# Altium PCB UARTRecorder.PcbDoc
Units mm, origin at the board's own origin, x right, y up, seen from the top; angles counter-clockwise.
Board outline 152.4 x 101.6 mm, 2 copper layers (Top Layer, Bottom Layer); 66 components, 53 nets, 258 pads, 164 vias.
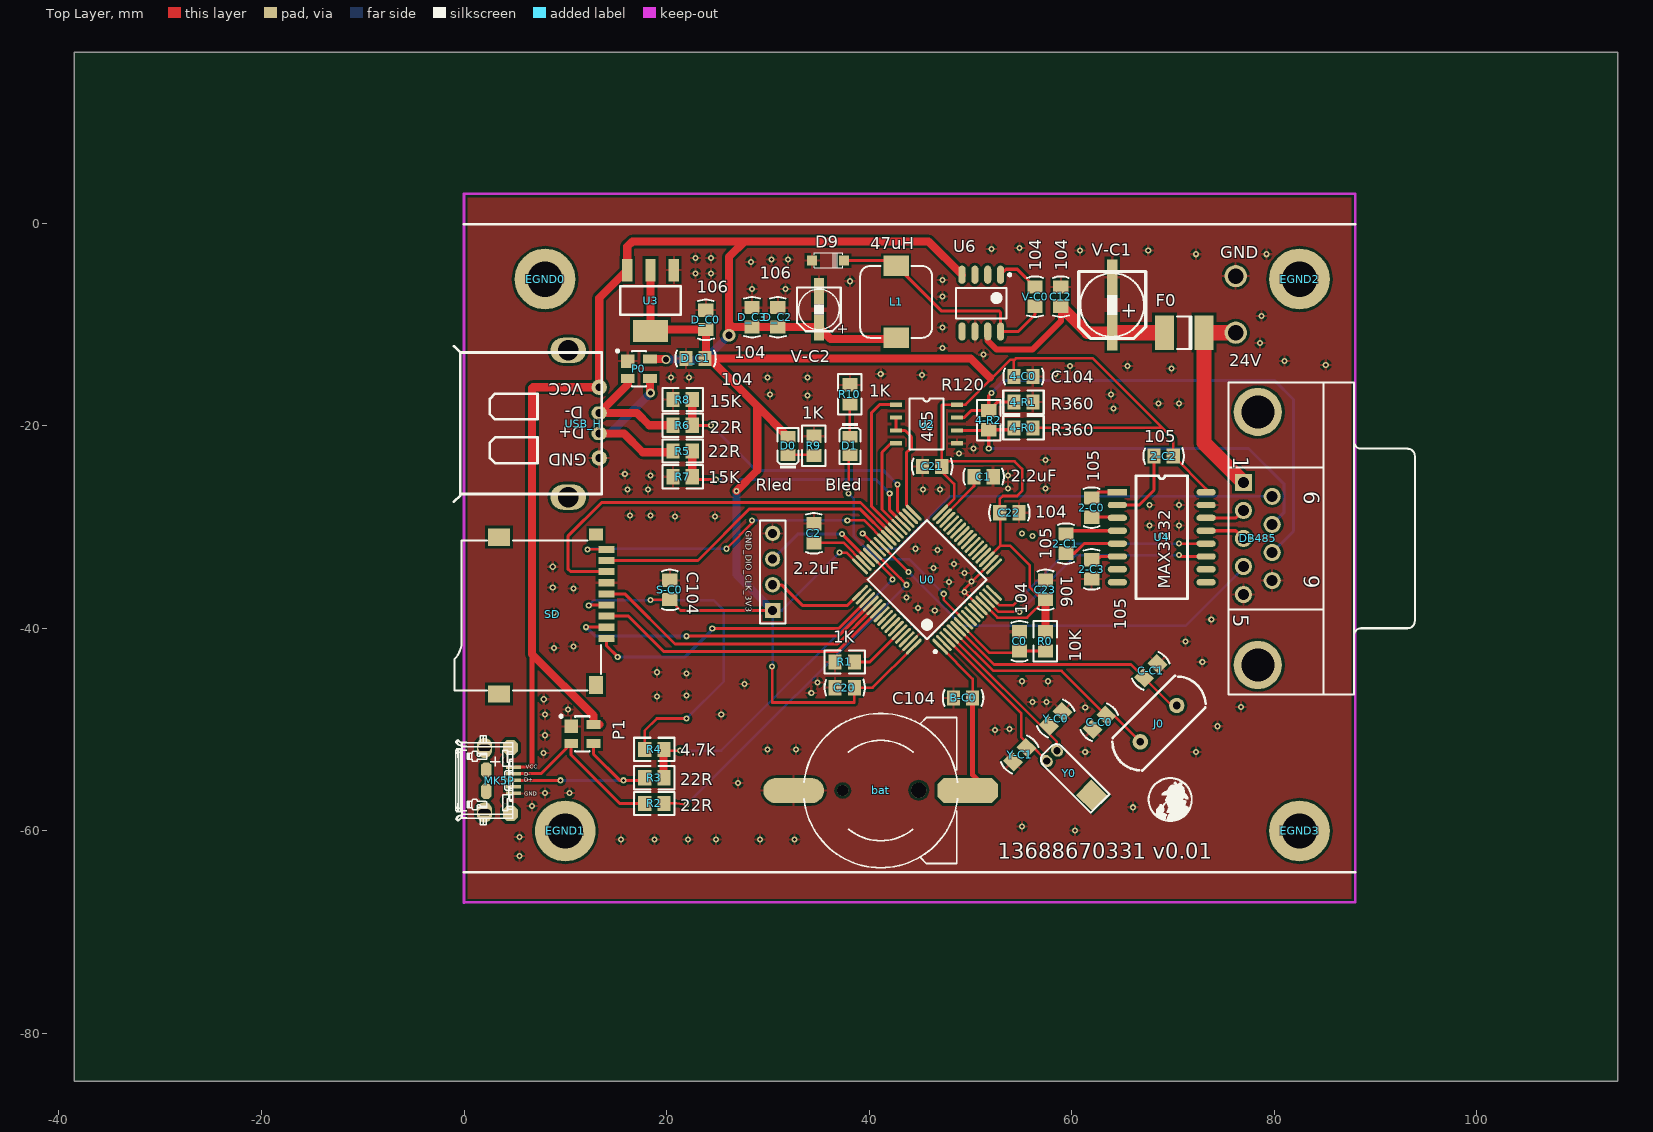
[diagram p0: Top Layer view]
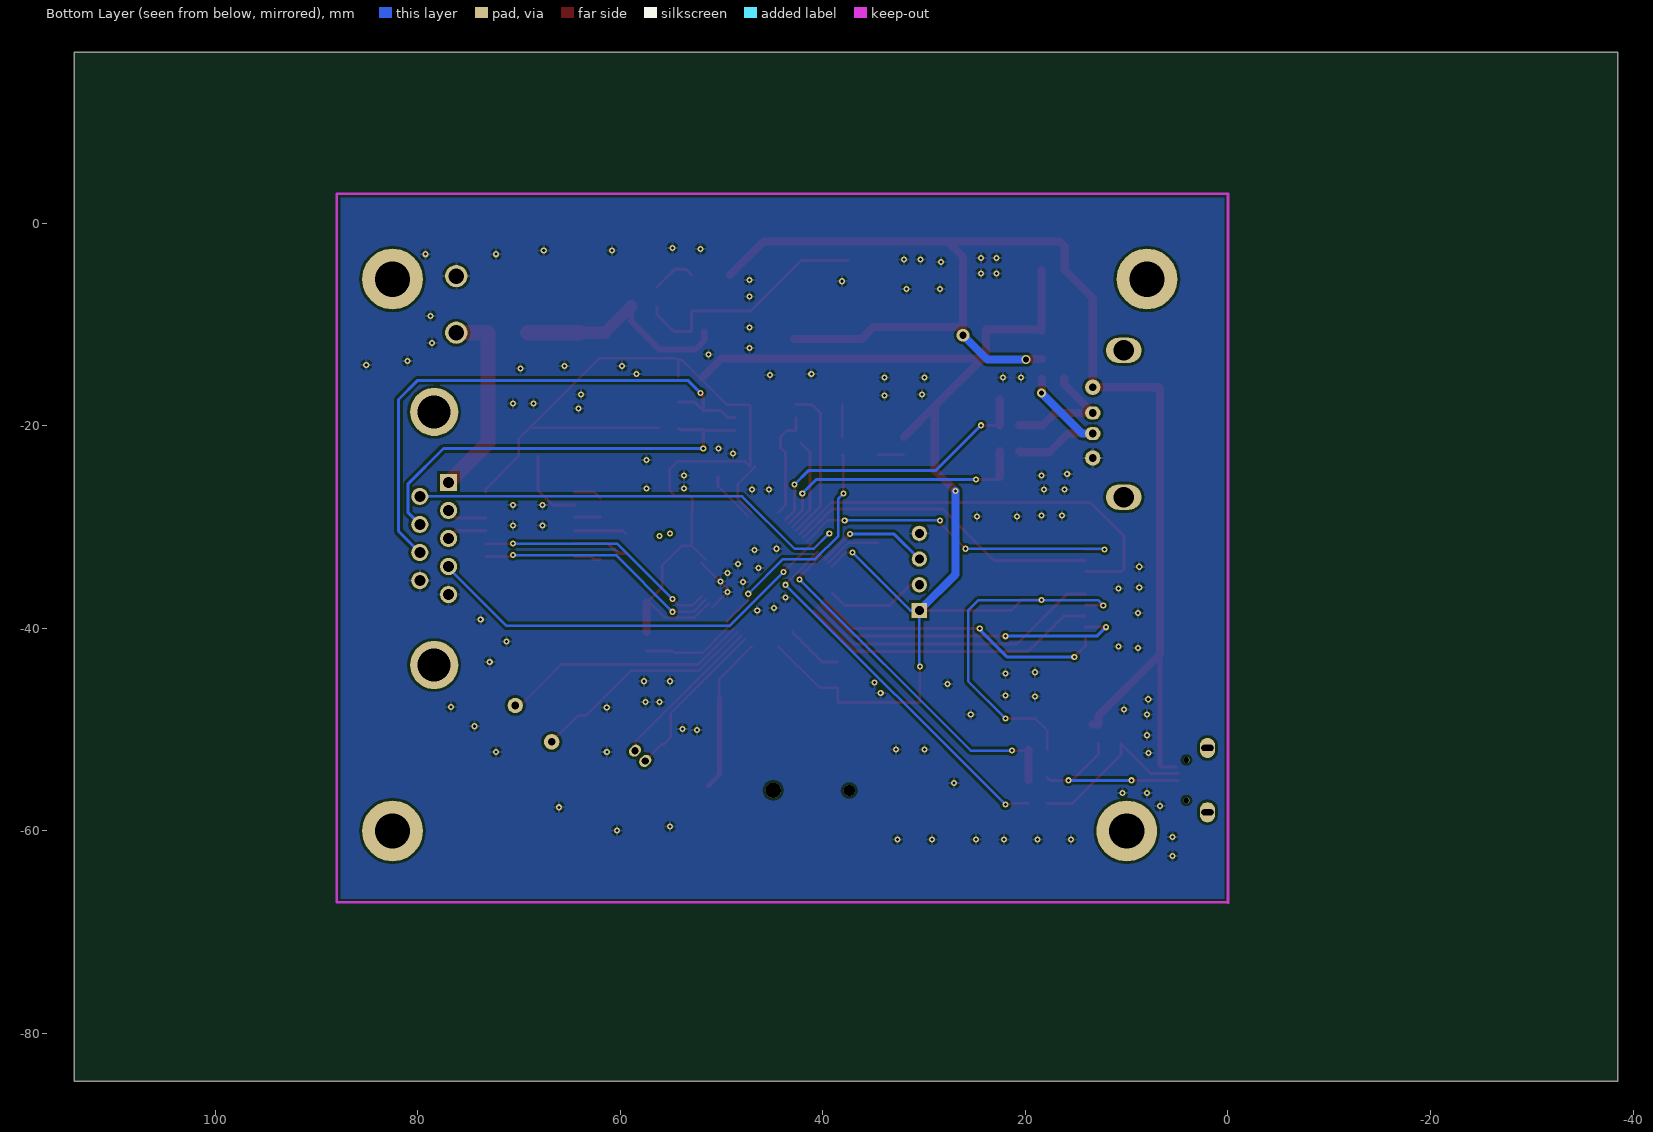
[diagram p1: Bottom Layer view, seen from below]

## Layer stack, top to bottom
Top Layer: signal copper 0.0356
Dielectric: dielectric 0.32, FR-4, Dk 4.8
Bottom Layer: signal copper 0.0356

## Board outline
-38.481,-84.709 113.919,-84.709 113.919,16.891 -38.481,16.891

## Design rules (kind name [scope] priority, off if disabled: settings)
Clearance [All] p1: gap=0.254
ComponentClearance [All] p1 off: gap=0.254 collisioncheckmode=3 verticalgap=0.254 showdistances=FALSE
Height [All] p1: minheight=0 maxheight=50.4 prefheight=12.7
HoleSize [All] p1: absolutevalues=TRUE maxlimit=6.3 minlimit=0.3 maxpercent=80.000 minpercent=20.000
HoleToHoleClearance [All] p1: gap=0.452 allowstackedmicrovias=TRUE
MinimumSolderMaskSliver [All] p1: minsoldermaskwidth=0.152
PasteMaskExpansion [All] p1: expansion=0.15
PolygonConnect [All] p1: connectstyle=Relief reliefconductorwidth=0.254 reliefentries=4 polygonreliefangle="90 Angle"
RoutingVias [All] p1: holewidth=0.4 width=0.8 viastyle="Through Hole" minholewidth=0.3 minwidth=0.6 maxholewidth=6.3 maxwidth=12
SilkscreenOverComponentPads [All] p1: minsilkscreentomaskgap=0
SolderMaskExpansion [All] p1: expansion=0.1
TestPointUsage [All] p1: valid=0 allowmultiple=FALSE
Testpoint [All] p1: side=15 testpointundercomponent=TRUE minsize=1.016 maxsize=2.54 preferedsize=1.524 minholesize=0 maxholesize=1.016 preferedholesize=0.813 testpointgrid=0.025 style=1021 order=0-112345678
Width VCC [InNet('VCC_5V')] p1: maxlimit=4 minlimit=0.254 preferedwidth=1
Width [All] p2: maxlimit=20 minlimit=0.2 preferedwidth=0.254
17 further rules are at their usual default settings.

## Components (designator, comment, footprint, x,y, rotation, side; value= is the part's Value field where it differs from the comment)
2-C0 "105" C-RAD-0805 61.976,-28.067 r90 top
2-C1 "105" C-RAD-0805 59.436,-31.623 r90 top
2-C2 "105" C-RAD-0805 69.088,-22.987 r180 top
2-C3 "105" C-RAD-0805 61.976,-34.163 r90 top
4-C0 "C104" C-RAD-0805 55.245,-15.113 r180 top
4-R0 "R360" R2012-0805 55.245,-20.193 r180 top
4-R1 "R360" R2012-0805 55.245,-17.653 r180 top
4-R2 "R120" R2012-0805 51.816,-19.431 r90 top
24V "1孔" HOLEx1#1 76.2,-10.795 r0 top (schematic designator k0)
B-C0 "C104" C-RAD-0805 49.276,-46.863 r0 top
bat "Battery" BATM 41.148,-56.007 r90 top
C0 "104" C-RAD-0805 54.864,-41.275 r90 top
C1 "2.2uF" C-RAD-0805 51.308,-25.019 r0 top
C2 "2.2uF" C-RAD-0805 34.544,-30.607 r90 top
C12 "104" C-RAD-0805 58.928,-7.239 r90 top
C20 "104" C-RAD-0805 37.592,-45.847 r0 top
C21 "106" C-RAD-0805 46.228,-24.003 r0 top
C22 "104" C-RAD-0805 53.848,-28.575 r180 top
C23 "106" C-RAD-0805 57.404,-36.195 r270 top
C-C0 "22pF" C-RAD-0805 62.738,-49.276 r45 top
C-C1 "22pF" C-RAD-0805 67.818,-44.196 r225 top
D0 "Rled" 0805_LED_S1 32.004,-21.971 r90 top
D1 "Bled" 0805_LED_S1 38.1,-21.971 r270 top
D9 "S7" SOD123 36.576,-3.683 r0 top
D_C0 "106" C-RAD-0805 23.876,-9.525 r270 top
D_C1 "104" C-RAD-0805 22.86,-13.335 r0 top
D_C2 "106" C-RAD-0805 30.988,-9.271 r90 top
D_C3 "104" C-RAD-0805 28.448,-9.271 r90 top
DB485 "DB9母座" DB9-F 87.884,-31.115 r270 top locked
EGND0 "1孔" HOLEx1#2 5.588,-5.207 r90 top
EGND1 "1孔" HOLEx1#3 10.668,-59.436 r90 top
EGND2 "1孔" HOLEx1#4 81.788,6.096 r90 top
EGND3 "1孔" HOLEx1#5 76.708,-59.436 r90 top
F0 "Fuse 1" 1812 71.12,-10.795 r180 top
GND "1孔" HOLEx1#1 76.2,-5.207 r0 top (schematic designator k1)
GND_DIO_CLK_3V3 "Header 4" HDR1X4 30.48,-38.227 r90 top
J0 "25M" 晶振HC-49S 68.58,-49.403 r225 top
L1 "47uH" L-SMD-7 42.672,-7.747 r270 top
MK5P "五脚端子" USB-MICRO1 4.572,-54.991 r90 top
P0 "PRTR5V0U2X" SOT-143 17.272,-14.351 r270 top
P1 "PRTR5V0U2X" SOT-143 11.684,-50.419 r270 top
R0 "10K" R2012-0805 57.404,-41.275 r270 top
R1 "1K" R2012-0805 37.592,-43.307 r180 top
R2 "22R" R2012-0805 18.796,-57.277 r180 top
R3 "22R" R2012-0805 18.796,-54.737 r180 top
R4 "4.7k" R2012-0805 18.796,-51.943 r180 top
R5 "22R" R2012-0805 21.59,-22.479 r180 top
R6 "22R" R2012-0805 21.59,-19.939 r180 top
R7 "15K" R2012-0805 21.59,-25.019 r180 top
R8 "15K" R2012-0805 21.59,-17.399 r180 top
R9 "1K" R2012-0805 34.544,-21.971 r270 top
R10 "1K" R2012-0805 38.1,-16.891 r270 top
S-C0 "C104" C-RAD-0805 20.32,-36.195 r90 top
SD "microSD" SDCARD-M 3.048,-38.735 r180 top locked
U0 "STM32F205RBT6" LQFP-64 45.72,-35.179 r135 top
U2 "485" SOP8 42.672,-17.907 r0 top
U3 "AMS1117-3.3" SOT-223 18.415,-7.62 r90 top
U4 "MAX3232" SOP16-50-208 64.516,-26.543 r0 top
U6 "LM2675M-5.0" "SOP8 - 3d" 51.054,-7.874 r270 top
USB_H "五脚端子" USB 6.096,-19.939 r180 top locked
V-C0 "104" C-RAD-0805 56.388,-7.239 r270 top
V-C1 "100uF/37V" SMD-EC-F6.3 64.008,-10.795 r90 top
V-C2 "47uF/37v" SMD-EC-F4 35.052,-10.287 r90 top
Y0 "32.768M" XTAL32 58.547,-52.07 r315 top
Y-C0 "20pF" C-RAD-0805 58.42,-48.895 r225 top
Y-C1 "20pF" C-RAD-0805 54.864,-52.451 r45 top

## Footprints (in the part's own frame and the unit in brackets; to place one, negate y for a bottom-side part, rotate by r counter-clockwise, add the part's x,y. Pads: shape width x height; smd on the part's side, far side on the other; paste and mask are expansions set on the pad)
0805_LED_S1 [mm]
  rect 1.16x1.47 smd: A(0.89,0) K(-0.89,0)
  silkscreen extent -2.24,-1.04 1.77,1.03, body extent -1.01,-0.62 1.01,0.62, height 1.1
1812 [mm] "Chip Capacitor; Body 4.5 x 3.2 mm (LxW typ)"
  rect 1.9x3.4 smd: 1(-1.95,0) 2(1.95,0)
  silkscreen extent -0.7,-1.6 0.7,1.6
BATM [mm]
  round 1.1 hole 1.1 unplated: 0(0,3.748)
  round 1.5 hole 1.5 unplated: 0(0.025,-3.752)
  oct 2.5x6 smd: 1(0,-8.602)
  oval 2.5x6 smd: 2(0,8.598)
  silkscreen extent -7.62,-7.58 7.62,7.57
C-RAD-0805 [mm] "贴片电容"
  rect 1.3x1.5 smd: 1(-0.95,0) 2(0.95,0)
  silkscreen extent -2,-0.79 2,0.79, body extent -1.27,-0.64 1.27,0.64, height 0.9
DB9-F [mm] "DB9母座"
  rect 1.69x1.69 hole 1.09: 1(-5.54,-10.92)
  round 1.69 hole 1.09: 2(-2.77,-10.92) 3(0,-10.92) 4(2.77,-10.92) 5(5.54,-10.92) 6(-4.155,-8.08) 7(-1.385,-8.08) 8(1.385,-8.08) 9(4.155,-8.08)
  round 4.76 hole 3.26: 10(-12.495,-9.5) 11(12.495,-9.5)
  silkscreen extent -15.4,-12.4 15.4,6
HDR1X4 [mm] "Connector; Header; 4 Position"
  rect 1.5x1.5 hole 0.9: 1(0,0)
  round 1.5 hole 0.9: 2(2.54,0) 3(5.08,0) 4(7.62,0)
  silkscreen extent -1.27,-1.27 8.89,1.27
HOLEx1#1 [mm]
  round 2.2 hole 1.524: 1(0,0)
HOLEx1#2 [mm]
  round 6 hole 3.5 paste+0.15: 1(-0.293,-2.412)
HOLEx1#3 [mm]
  round 6 hole 3.5: 1(-0.564,0.668)
HOLEx1#4 [mm]
  round 6 hole 3.5: 1(-11.596,-0.712)
HOLEx1#5 [mm]
  round 6 hole 3.5: 1(-0.564,-5.792)
L-SMD-7 [mm] "贴片电感7*7"
  rect 2x2.5 smd: 1(-3.556,0) 2(3.556,0)
  silkscreen extent -3.56,-3.56 3.56,3.56, body extent -3.56,-3.56 3.56,3.56, height 4
LQFP-64 [mm] "LQFP64"
  oval 2.1x0.3 smd: 1(-5.6,3.75) 2(-5.6,3.25) 3(-5.6,2.75) 4(-5.6,2.25) 5(-5.6,1.75) 6(-5.6,1.25) 7(-5.6,0.75) 8(-5.6,0.25) 9(-5.6,-0.25) 10(-5.6,-0.75) 11(-5.6,-1.25) 12(-5.6,-1.75) 13(-5.6,-2.25) 14(-5.6,-2.75) 15(-5.6,-3.25) 16(-5.6,-3.75) 33(5.6,-3.75) 34(5.6,-3.25) 35(5.6,-2.75) 36(5.6,-2.25) 37(5.6,-1.75) 38(5.6,-1.25) 39(5.6,-0.75) 40(5.6,-0.25) 41(5.6,0.25) 42(5.6,0.75) 43(5.6,1.25) 44(5.6,1.75) 45(5.6,2.25) 46(5.6,2.75) 47(5.6,3.25) 48(5.6,3.75)
  oval 0.3x2.1 smd: 17(-3.75,-5.6) 18(-3.25,-5.6) 19(-2.75,-5.6) 20(-2.25,-5.6) 21(-1.75,-5.6) 22(-1.25,-5.6) 23(-0.75,-5.6) 24(-0.25,-5.6) 25(0.25,-5.6) 26(0.75,-5.6) 27(1.25,-5.6) 28(1.75,-5.6) 29(2.25,-5.6) 30(2.75,-5.6) 31(3.25,-5.6) 32(3.75,-5.6) 49(3.75,5.6) 50(3.25,5.6) 51(2.75,5.6) 52(2.25,5.6) 53(1.75,5.6) 54(1.25,5.6) 55(0.75,5.6) 56(0.25,5.6) 57(-0.25,5.6) 58(-0.75,5.6) 59(-1.25,5.6) 60(-1.75,5.6) 61(-2.25,5.6) 62(-2.75,5.6) 63(-3.25,5.6) 64(-3.75,5.6)
  silkscreen extent -5.72,-4.15 4.15,4.57, body extent -5,-5 5,5, height 1.6
R2012-0805 [mm] "Thermistor; 2 Leads"
  rect 1.3x1.5 smd: 1(-0.95,0) 2(0.95,0)
  silkscreen extent -2,-1.15 2,1.15, body extent -1.02,-0.64 0.98,0.62
SDCARD-M [mm] "TF卡"
  rect 1.6x0.7 smd: 1(-11.008,2.25) 2(-11.008,1.15) 3(-11.008,0.05) 4(-11.008,-1.05) 5(-11.008,-2.15) 6(-11.008,-3.25) 7(-11.008,-4.35) 8(-11.008,-5.45) 9(-11.008,-6.55)
  rect 1.4x1.2 smd: 10(-10,-8.004)
  rect 2.2x1.7 smd: 11(-0.4,-7.75) 13(-0.4,7.75)
  rect 1.4x1.8 smd: 12(-10,6.85)
  silkscreen extent -10.5,-7.4 4,7.4
SMD-EC-F4 [mm]
  rect 2.6x1 smd: 1(0,0) 2(3.579,0)
  silkscreen extent -0.36,-2.15 3.94,2.15
SMD-EC-F6.3 [mm]
  rect 3.5x1 smd: 1(0,0) 2(5.475,0)
  silkscreen extent -0.56,-3.31 6.04,3.31
SOD123 [mm] "Chip Capacitor; Body 2.0 x 1.2 mm (LxW typ)"
  rect 1x1 smd: 1(-2.2,0) 2(0.95,0)
  silkscreen extent -2,-0.7 0.8,0.8
SOP8 [mm]
  rect 1.2x0.42 smd: 1(0,0) 2(0,-1.27) 3(0,-2.54) 4(0,-3.81) 5(6,-3.81) 6(6,-2.54) 7(6,-1.27) 8(6,0)
  silkscreen extent 1.33,-4.44 4.67,0.64
"SOP8 - 3d" [mm]
  oval 1.8x0.7 smd: 1(-2.8,1.93) 2(-2.8,0.66) 3(-2.8,-0.61) 4(-2.8,-1.88) 5(2.8,-1.88) 6(2.8,-0.61) 7(2.8,0.66) 8(2.8,1.93)
  silkscreen extent -2.92,-2.48 1.5,2.96, body extent -3.02,-2.51 3.02,2.51, height 1.6
SOP16-50-208 [mil]
  rect 75x25 smd: 1(0,0)
  oval 75x25 smd: 2(0,-50) 3(0,-100) 4(0,-150) 5(0,-200) 6(0,-250) 7(0,-300) 8(0,-350) 9(345,-350) 10(345,-300) 11(345,-250) 12(345,-200) 13(345,-150) 14(345,-100) 15(345,-50) 16(345,0)
  silkscreen extent 72,-414 272,64
SOT-143 [mm] "SOT-143; 4 Leads; Body 3 x 2.6 mm, inc. leads (LxW max)"
  rect 1.35x1.35 smd: 1(-0.75,-1.1)
  rect 0.9x1.35 smd: 2(0.95,-1.1) 3(0.95,1.1) 4(-0.95,1.1)
  silkscreen extent -1.87,-2.22 1.75,0.7
SOT-223 [mm]
  rect 2.2x1 smd: 1(3,-2.3) 2(3,0) 3(3,2.3)
  rect 2.2x3.5 smd: 2(-3,0)
  silkscreen extent -1.4,-3 1.4,3, body extent -3.49,-3.24 3.49,3.24, height 1.64
USB [mm]
  round 1.524 hole 0.762: 1(-7.255,-3.757) 4(-7.255,3.228)
  oval 1.524x1.324 hole 0.762: 2(-7.255,-1.217) 3(-7.255,0.815)
  oval 3.5x2.5 hole 2: VSS(-4.2,7.1) VSS2(-4.2,-7.4)
  silkscreen extent -7.51,-7.82 7.1,7.55, body extent -8,-8.1 6.1,7.7, height 6.35
USB-MICRO1 [mm] "USB AF/10.0 4P母座卷边SMT(前插后贴) H=6.8mm"
  rect 0.35x1.5 smd: 1(-1.3,-0.33) 2(-0.65,-0.33) 3(0,-0.33) 4(0.65,-0.33) 5(1.3,-0.33)
  oct 1.5x1.5 smd: ""(-3.275,-0.025) ""(3.225,-0.025)
  oval 2x1.5 hole 0.6 slot 1.2 at 90 deg: ""(-3.165,2.545) ""(3.195,2.545)
  oct 1.5x1 smd: ""(-1.075,2.375) ""(1.025,2.375)
  silkscreen extent -4.41,-0.23 4.4,5.39
XTAL32 [mil]
  oval 50x40 hole 28: 1(0,0) 2(0,-56)
  rect 92.13x86 smd: ""(220,-27)
  silkscreen extent -28,-77 264,25
晶振HC-49S [mil]
  round 60 hole 30: 1(100,0) 2(-100,0)
  silkscreen extent -212,-87 209,84, body extent -223,-93 223,90, height 138

## Part data
2-C0 2-C1 2-C2 2-C3: library part "0805 1uF (105) 10% 50V", "贴片电容"
4-C0 B-C0 S-C0: library part "Cap Semi", "Capacitor (Semiconductor SIM Model)"
4-R0 4-R1 4-R2: library part Res3, "Resistor"
bat: "Multicell Battery"
C0 D_C0 D_C1 D_C2 D_C3 V-C0: library part "0805 100nF(104) 10% 50V", "贴片电容"
C1 C2: library part "0805 2.2uF (225) 20% 50V", "贴片电容"
C12 C20 C21 C22 C23: library part Cap, "Capacitor"
C-C0 C-C1: library part "0603 22pF (220) 5% 50V", "贴片电容"
D0: library part "0805 红灯", "发光二极管"
D1: library part "0805 蓝灯", "发光二极管"
D9: library part "D Schottky", "Schottky Diode"
DB485: library part 9脚封装DB9
F0: "Fuse"
GND_DIO_CLK_3V3: "Header, 4-Pin"
J0: library part 晶振
L1: library part Lnductor
R0 R2 R3 R4 R5 R6 R7 R8 R9 R10: library part "0805 1KΩ (1001) 1%", "贴片电阻"
R1: library part "0603 1KΩ (1001) 1%", "贴片电阻"
U0: "ARM Cortex-M3 32-bit MCU, 128 KB Flash, 64 KB Internal RAM, 51 I/Os, 64-pin LQFP, -40 to 85 degC, Tray"
U2: library part SP3485
U3: library part "SOT-223 AMS1117-3.3", "低压差线性稳压(LDO)"
U6: library part TPS5410
V-C1 V-C2: library part "Cap Pol3", "Polarized Capacitor (Surface Mount)"
Y0: library part XTAL, "Crystal Oscillator"
Y-C0 Y-C1: library part "0805 20pF (200) 5% 50V", "贴片电容"

## Via types
v1: diameter 0.6, hole 0.3, Top Layer to Bottom Layer, 159 vias
v2: diameter 0.6, hole 0.55, Top Layer to Bottom Layer, 2 vias
v3: diameter 0.9, hole 0.6, Top Layer to Bottom Layer, 1 vias
v4: diameter 0.9, hole 0.5, Top Layer to Bottom Layer, 1 vias
v5: diameter 1.27, hole 0.711, Top Layer to Bottom Layer, 1 vias

## Nets (pads, with @x,y where several pads share a name; then routed paths per layer and width w, separated by ;. In a path a pad name is that pad's centre, name@x,y a point inside that pad or via, vN(x,y) a via of type N, cw(c..) or ccw(c..) an arc to the next point about the centre after c; other vN are vias at no path point)
BAT: B-C0.2 bat.1 U0.1 | length 15.5
  Top Layer w0.254: U0.1 50.226,-44.988 B-C0.2
  Top Layer w0.5: B-C0.2 50.226,-54.451 bat.1@51.274,-55.499
GND: 2-C3.1 4-C0.1 4-R1.1 B-C0.1 bat.2 C0.2 C1.2 C2.2 C12.2 C20.1 C21.1 C22.1 C23.1 C-C0.1 C-C1.1 D9.1 D_C0.1 D_C1.1 D_C2.2 D_C3.2 DB485.5 DB485.9 GND.1 GND_DIO_CLK_3V3.4 MK5P.1 P0.1 P1.1 R1.2 R7.2 R8.2 R9.1 R10.1 S-C0.2 SD.6 U0.12 U0.18 U0.63 U2.5 U3.1 U4.15 U6.6 USB_H.4 V-C1.2 V-C2.2 Y-C0.1 Y-C1.1 | length 6.1
  Top Layer w0.254: U0.12 v1(49.403,-36.387) 49.403,-36.092 U0.18
  other v1: 5.461,-62.484 15.494,-60.833 18.796,-60.833 22.098,-60.833 24.892,-60.833 29.21,-60.833 32.639,-60.833 5.461,-60.579 60.325,-59.944 55.118,-59.563 66.04,-57.658 6.731,-57.531 8.001,-56.261 10.414,-56.261 27.051,-55.245 7.87,-52.305 61.341,-52.197 72.263,-52.197 29.972,-51.943 32.766,-51.943 8.001,-50.546 52.451,-50.038 53.848,-49.911 74.422,-49.657 8.001,-48.514 25.4,-48.514 10.287,-48.006 61.343,-47.808 76.708,-47.752 56.134,-47.244 57.531,-47.244 7.874,-46.99 19.05,-46.736 21.971,-46.609 34.29,-46.355 27.686,-45.466 34.925,-45.339 55.118,-45.212 57.658,-45.212 21.971,-44.45 19.05,-44.323 72.898,-43.307 8.89,-41.91 10.795,-41.783 71.247,-41.275 73.787,-39.116 8.89,-38.481 46.482,-38.227 44.831,-37.973 43.688,-36.957 10.795,-36.068 8.763,-35.941 47.879,-35.433 50.126,-35.369 49.403,-34.544 46.355,-34.036 8.763,-33.909 48.387,-33.655 46.736,-32.258 44.577,-32.131 67.691,-29.845 70.612,-29.845 20.828,-28.956 24.765,-28.956 16.383,-28.829 18.415,-28.829 67.691,-27.813 70.612,-27.813 16.129,-26.289 18.161,-26.289 45.339,-26.289 46.99,-26.289 53.721,-26.162 57.404,-26.162 18.415,-24.892 53.721,-24.892 15.875,-24.765 57.404,-23.368 48.895,-22.733 50.292,-22.225 64.135,-18.288 68.58,-17.78 70.612,-17.78 33.909,-17.018 30.226,-16.891 63.881,-16.891 20.447,-15.24 22.225,-15.24 29.972,-15.24 33.909,-15.24 45.212,-14.986 41.148,-14.859 58.42,-14.859 69.85,-14.351 59.817,-14.097 65.532,-14.097 85.09,-13.97 81.026,-13.589 51.308,-12.954 47.244,-12.319 78.613,-11.811 47.244,-10.287 78.74,-9.144 47.244,-7.239 28.448,-6.477 31.75,-6.477 38.1,-5.715 47.244,-5.588 22.86,-4.953 24.384,-4.953 28.321,-3.81 30.353,-3.556 32.004,-3.556 22.86,-3.429 24.384,-3.429 72.263,-3.048 79.248,-3.048 60.833,-2.667 67.564,-2.667 52.07,-2.54 54.864,-2.413
IO2: P0.2 R6.2 USB_H.2 | length 12.4
  Top Layer w0.8: P0.2 16.172,-15.901 USB_H.2 17.071,-18.722 18.288,-19.939 R6.2
IO3: P0.3 R5.2 USB_H.3 | length 16.3
  Top Layer w0.8: USB_H.3 15.801,-20.754 17.653,-22.606 20.513,-22.606 R5.2 ; P0.3 18.372,-16.721 v4(18.415,-16.764)
  Bottom Layer w0.8: USB_H.3 14.425,-20.754 v4(18.415,-16.764)
IO4: MK5P.4 P1.2 R2.2 | length 17.3
  Top Layer w0.3: MK5P.4 7.612,-54.341 P1.2 10.584,-52.494 15.367,-57.277 R2.2
IO5: MK5P.3 P1.3 R3.2 | length 18.1
  Top Layer w0.3: MK5P.3 v1(9.525,-54.991) ; P1.3 12.784,-52.408 15.367,-54.991 17.592,-54.991 R3.2
  Bottom Layer w0.3: v1(9.525,-54.991) v1(15.748,-54.991)
LED: D1.A U0.8 | length 23.1
  Top Layer w0.254: v1(37.973,-26.67) 37.973,-22.988 D1.A ; v1(47.371,-36.576) 47.371,-37.184 U0.8
  Bottom Layer w0.254: v1(37.973,-26.67) 38.481,-27.178 38.481,-30.861 40.767,-33.147 43.942,-33.147 v1(47.371,-36.576)
Net2-C0_1: 2-C0.1 U4.3 | length 2.6
  Top Layer w0.3: 2-C0.1 64.45,-29.017 U4.3
Net2-C0_2: 2-C0.2 U4.1 | length 2.8
  Top Layer w0.3: 2-C0.2 62.55,-26.543 U4.1
Net2-C1_1: 2-C1.1 U4.5 | length 5.5
  Top Layer w0.3: 2-C1.1 60.264,-32.573 61.214,-31.623 U4.5
Net2-C1_2: 2-C1.2 U4.4 | length 5.2
  Top Layer w0.3: 2-C1.2 59.756,-30.353 U4.4
Net2-C2_2: 2-C2.2 U4.2 | length 7.6
  Top Layer w0.3: U4.2 66.675,-27.813 68.138,-26.35 2-C2.2
Net2-C3_2: 2-C3.2 U4.6 | length 2.7
  Top Layer w0.3: 2-C3.2 62.545,-33.213 62.865,-32.893 U4.6
NetC1_1: C1.1 U0.31 | length 5.1
  Top Layer w0.254: U0.31 50.358,-25.945 C1.1
NetC2_1: C2.1 U0.47 | length 5.7
  Top Layer w0.254: C2.1 37.502,-31.557 U0.47
NetD0_K: D0.K R9.2 | length 2.6
  Top Layer w0.254: D0.K 34.484,-22.861 R9.2
NetD1_K: D1.K R10.2 | length 3.2
  Top Layer w0.254: D1.K R10.2
NetD9_2: D9.2 L1.1 U6.8 V-C0.2 | length 24.4
  Top Layer w0.3: D9.2 42.164,-3.683 L1.1 47.117,-8.636 52.832,-8.636 52.984,-8.788 U6.8 54.731,-10.674 56.388,-9.017 V-C0.2
NetR1_1: R1.1 U0.60 | length 5.7
  Top Layer w0.3: R1.1 40.067,-43.307 U0.60
NetU6_1: U6.1 V-C0.1 | length 4.4
  Top Layer w0.3: U6.1 53.525,-4.533 54.632,-4.533 V-C0.1
NRST: C0.1 R0.2 U0.7 | length 9.5
  Top Layer w0.254: U0.7 51.898,-42.418 54.671,-42.418 C0.1 R0.2
OSC32_IN: U0.3 Y0.2 Y-C1.2 | length 16.2
  Top Layer w0.254: U0.3 55.028,-48.376 55.028,-50.763 55.726,-51.462 55.927,-51.462 Y0.2
OSC32_OUT: U0.4 Y0.1 Y-C0.2 | length 15.7
  Top Layer w0.254: U0.4 58.547,-51.188 Y0.1
OSC_IN: C-C0.2 J0.1 U0.5 | length 22.8
  Top Layer w0.254: U0.5 52.262,-44.196 59.002,-44.196 C-C0.2 64.189,-48.604 J0.1
OSC_OUT: C-C1.2 J0.2 U0.6 | length 24.7
  Top Layer w0.254: U0.6 52.334,-43.561 65.839,-43.561 C-C1.2 69.885,-47.607 J0.2
RS232_RX: DB485.3 U4.13 | length 4
  Top Layer w0.3: U4.13 76.202,-30.353 DB485.3
RS232_TX: DB485.2 U4.14 | length 4
  Top Layer w0.3: U4.14 76.226,-29.083 DB485.2
RS485_A: 4-R0.2 4-R2.1 DB485.7 U2.6 | length 42.6
  Top Layer w0.3: U2.6 51.75,-20.447 4-R2.1 ; v1(51.816,-22.225) 4-R2.1 ; 4-R0.2 54.107,-20.381 4-R2.1
  Bottom Layer w0.3: v1(51.816,-22.225) 77.47,-22.225 80.953,-25.708 80.953,-28.581 DB485.7
RS485_B: 4-R1.2 4-R2.2 DB485.8 U2.7 | length 55.2
  Top Layer w0.3: U2.7 49.403,-19.177 50.099,-18.481 4-R2.2 ; v1(52.07,-16.764) 51.816,-17.018 4-R2.2 ; 4-R1.2 52.644,-17.653 4-R2.2
  Bottom Layer w0.3: v1(52.07,-16.764) 53.34,-15.494 80.01,-15.494 81.915,-17.399 81.915,-30.389 DB485.8
RS485_RE: U0.33 U2.2 U2.3 | length 11.1
  Top Layer w0.3: U2.2 U2.3 43.561,-20.447 44.196,-21.082 44.196,-22.225 43.688,-22.606 43.688,-27.844 U0.33
SD_CK: SD.5 U0.53 | length 30
  Top Layer w0.3: SD.5 15.884,-36.585 20.828,-41.529 36.895,-41.529 U0.53
SD_CMD: SD.3 U0.54 | length 29.9
  Top Layer w0.3: SD.3 16.245,-38.785 19.751,-42.291 35.828,-42.291 35.866,-42.253 36.878,-42.253 U0.54
SD_D0: SD.7 U0.39 | length 41.8
  Top Layer w0.3: SD.7 10.509,-34.385 10.287,-34.163 10.287,-30.861 13.589,-27.559 39.161,-27.559 U0.39
SD_D1: SD.8 U0.40 | length 31.5
  Top Layer w0.3: SD.8 15.494,-33.285 ; 15.748,-33.274 15.505,-33.274 15.494,-33.285 ; U0.40@41.96,-31.065 39.089,-28.194 28.194,-28.194 23.103,-33.285 15.494,-33.285
SD_D2: SD.1 U0.51 | length 29.3
  Top Layer w0.3: SD.1 14.056,-41.676 v1(15.179,-42.799) ; v1(24.511,-40.005) 37.005,-40.005 U0.51
  Bottom Layer w0.3: v1(15.179,-42.799) 21.844,-42.799 24.511,-40.132 v1(24.511,-40.005)
SD_D3: SD.2 U0.52 | length 31.8
  Top Layer w0.3: v1(12.065,-39.878) 14.049,-39.878 SD.2 ; v1(21.971,-40.767) 36.95,-40.767 U0.52
  Bottom Layer w0.3: v1(12.065,-39.878) 12.954,-40.767 v1(21.971,-40.767)
SD_EXTI: SD.9 U0.41 | length 33.6
  Top Layer w0.254: v1(12.192,-32.185) SD.9 ; v1(25.908,-32.131) 28.448,-29.591 v1(28.448,-29.337) ; v1(37.846,-29.337) 39.524,-29.337 U0.41
  Bottom Layer w0.254: v1(12.192,-32.185) 12.246,-32.131 v1(25.908,-32.131) v1@26.035,-32.004 ; v1(28.448,-29.337) v1(37.846,-29.337)
SW_CLK: GND_DIO_CLK_3V3.2 U0.49 | length 10
  Top Layer w0.3: GND_DIO_CLK_3V3.2 31.369,-35.687 33.401,-37.719 37.877,-37.719 U0.49
SWDIO: GND_DIO_CLK_3V3.3 U0.46 | length 11.4
  Top Layer w0.3: v1(37.338,-30.686) U0.46
  Bottom Layer w0.3: GND_DIO_CLK_3V3.3 32.941,-30.686 v1(37.338,-30.686)
UART1_RX: DB485.6 U0.43 | length 45.2
  Top Layer w0.254: v1(39.37,-30.607) 39.38,-30.607 U0.43
  Bottom Layer w0.254: v1@39.439,-30.665 40.904,-32.131 42.799,-32.131 47.97,-26.96 DB485.6
UART1_TX: DB485.4 U0.42 | length 41.6
  Top Layer w0.254: U0.42 v1(43.897,-34.417)
  Bottom Layer w0.254: v1(43.897,-34.417) 49.231,-39.751 71.247,-39.751 76.964,-34.034 DB485.4
UART4_RX: U0.15 U4.12 | length 24.2
  Top Layer w0.254: U0.15 52.856,-37.719 54.229,-37.719 v1(54.864,-37.084) ; v1(70.612,-31.623) U4.12
  Bottom Layer w0.254: v1(54.864,-37.084) 60.325,-31.623 v1(70.612,-31.623)
UART4_TX: U0.14 U4.11 | length 24.5
  Top Layer w0.254: U0.14 52.784,-38.354 v1(54.864,-38.354) ; v1(70.612,-32.766) 70.739,-32.893 U4.11
  Bottom Layer w0.254: v1(54.864,-38.354) 60.452,-32.766 v1(70.612,-32.766)
UART6_RX: U0.38 U2.1 | length 15.4
  Top Layer w0.3: U0.38 40.259,-27.95 40.259,-18.669 41.021,-17.907 U2.1
UART6_TX: U0.37 U2.4 | length 9.3
  Top Layer w0.3: U2.4@42.164,-21.717 41.275,-22.606 41.275,-28.259 U0.37
USB_D+: R3.1 R4.1 U0.45 | length 35.9
  Top Layer w0.254: R4.1 19.873,-52.07 v1(21.336,-52.07) ; U0.45 42.291,-34.932 v1(42.291,-35.179)
  Top Layer w0.8: R3.1@19.685,-54.991 R4.1@19.685,-51.943
  Bottom Layer w0.254: v1(21.336,-52.07) 25.4,-52.07 v1(42.291,-35.179)
USB_D-: R2.1 U0.44 | length 37.5
  Top Layer w0.254: R2.1 20.955,-57.277 v1(21.971,-57.404) ; U0.44 43.118,-35.052 v1(43.688,-35.687)
  Bottom Layer w0.254: v1(21.971,-57.404) v1(43.688,-35.687)
USB_HD+: R5.1 R7.1 U0.36 | length 25.9
  Top Layer w0.3: R7.1@22.794,-25.273 v1(24.892,-25.273) ; v1(42.037,-26.67) 42.037,-28.314 U0.36
  Top Layer w0.8: R7.1 R5.1
  Bottom Layer w0.3: v1(24.892,-25.273) 40.64,-25.273 v1(42.037,-26.67)
USB_HD-: R6.1 R8.1 U0.35 | length 29.1
  Top Layer w0.3: R6.1 v1(24.384,-19.939) ; v1(42.799,-25.781) 42.799,-28.369 U0.35
  Top Layer w0.8: R6.1 R8.1
  Bottom Layer w0.3: v1(24.384,-19.939) 28.829,-24.384 41.402,-24.384 v1(42.799,-25.781)
VCC-24V: 24V.1 DB485.1 F0.1 | length 19.5
  Top Layer w1.5: 24V.1 F0.1 73.07,-21.681 DB485.1
VCC_3.3V: 2-C2.1 4-C0.2 4-R0.1 C20.2 C21.2 C22.2 C23.2 D0.A D_C0.2 D_C1.2 GND_DIO_CLK_3V3.1 R0.1 R4.2 S-C0.1 SD.4 U0.13 U0.19 U0.32 U0.48 U0.64 U2.8 U3.2 U4.16 | length 261.4
  Top Layer w0.254: v1(12.319,-37.719) 12.353,-37.685 SD.4 ; R4.2 17.846,-50.099 19.05,-48.895 v1(21.971,-48.895) ; v1(18.415,-37.211) 18.481,-37.145 S-C0.1 21.402,-38.227 GND_DIO_CLK_3V3.1 ; v1(30.419,-43.749) 30.419,-47.31 38.542,-47.31 C20.2 40.355,-45.847 U0.64 ; v1(37.084,-32.512) 37.75,-32.512 U0.48 ; C21.2@46.67,-24.003 48.387,-25.72 48.387,-27.209 U0.32 ; U0.13 52.658,-38.935 55.614,-38.935 C23.2 ; U0.19 52.959,-31.829 ; C22.2 52.898,-27.239 53.213,-26.924 54.61,-26.924 55.118,-26.416 55.118,-24.257 54.356,-23.495 47.686,-23.495 C21.2 47.178,-17.968 47.239,-17.907 U2.8 49.53,-17.907 53.975,-13.462 54.356,-13.462 ; C22.2@52.959,-28.194 52.959,-31.829 ; 4-C0.2 54.295,-13.523 54.483,-13.335 62.103,-13.335 68.961,-20.193 ; 4-R0.1 68.961,-20.193 ; C23.2@57.404,-37.465 55.88,-35.941 55.88,-33.782 53.927,-31.829 52.959,-31.829 ; U4.16 73.279,-26.228 2-C2.1 70.038,-21.27 68.961,-20.193
  Top Layer w0.8: U3.2@18.415,-4.62 18.415,-10.62 18.56,-10.475 D_C0.2 23.876,-13.269 D_C1.2 ; v1(26.924,-26.416) 28.957,-24.383 28.957,-18.034 ; D0.A 28.957,-18.034 ; 51.943,-15.24 50.038,-13.335 D_C1.2 ; R0.1 C23.2@57.404,-37.465 ; D_C1.2 24.258,-13.335 28.957,-18.034
  Bottom Layer w0.254: v1(12.319,-37.719) 12.827,-37.211 v1(18.415,-37.211) 24.638,-37.211 25.654,-38.227 25.654,-45.212 v1(21.971,-48.895) ; v1(30.419,-43.749) 30.48,-43.688 GND_DIO_CLK_3V3.1 31.369,-38.227 v1(37.084,-32.512)
  Bottom Layer w0.8: v1(26.924,-26.416) 26.924,-34.671 GND_DIO_CLK_3V3.1
VCC_5V: D_C2.1 D_C3.1 L1.2 MK5P.5 P0.4 P1.4 U3.3 U6.4 USB_H.1 V-C2.1 | length 141.6
  Top Layer w0.3: MK5P.5@5.08,-53.691 6.731,-53.691
  Top Layer w0.5: 6.731,-53.467 6.731,-42.164
  Top Layer w0.8: P1.4@13.396,-49.469 P1.4 12.784,-48.598 6.731,-42.545 6.731,-16.256 6.805,-16.182 USB_H.1 13.351,-7.384 U3.3 16.115,-2.3 16.637,-1.778 27.686,-1.778 ; P0.4 v3@19.939,-13.401 ; v5(26.162,-11.049) 26.162,-9.906 ; L1.2@42.799,-11.43 36.195,-11.43 V-C2.1 34.986,-10.221 D_C2.1 D_C3.1 26.477,-10.221 26.162,-9.906 ; U6.4 45.878,-1.778 27.686,-1.778 ; 26.162,-9.906 26.162,-3.302 27.686,-1.778
  Bottom Layer w0.8: v3(19.939,-13.462) 23.749,-13.462 v5(26.162,-11.049)
VIN: C12.1 F0.2 U6.7 V-C1.1 | length 22.4
  Top Layer w0.6: U6.7 51.714,-11.582 52.603,-12.471 56.109,-12.471 58.928,-9.652 C12.1
  Top Layer w1.2: C12.1 61.534,-10.795 V-C1.1
  Top Layer w1.5: V-C1.1 F0.2
pads on no net: bat.0 DB485.10 DB485.11 EGND0.1 EGND1.1 EGND2.1 EGND3.1 MK5P. MK5P.2 SD.10 SD.11 SD.12 SD.13 U0.2 U0.9 U0.10 U0.11 U0.16 U0.17 U0.20 U0.21 U0.22 U0.23 U0.24 U0.25 U0.26 U0.27 U0.28 U0.29 U0.30 U0.34 U0.50 U0.55 U0.56 U0.57 U0.58 U0.59 U0.61 U0.62 U4.7 U4.8 U4.9 U4.10 U6.2 U6.3 U6.5 USB_H.VSS USB_H.VSS2 Y0.
copper on no net:
  other v1: 56.134,-30.861 55.118,-30.607
  other v2: 4.102,-56.991 4.102,-52.991

## Polygon pours and split planes (outlines as drawn)
GND on Top Layer "Top Layer-No Net" (solid): 0,2.921 88.138,2.921 88.265,3.048 88,2.783 88,-67.056 -0.254,-67.056
GND on Bottom Layer "Top Layer-No Net" (solid): 0,2.921 88,2.921 88,-67.056 87.873,-66.929 0,-66.929

## Keep-outs
Keep-Out Layer:
  lines w0.254: 0,-67.079 0,2.921 88,2.921 88,-67.056 0,-67.056

## Silkscreen, mask and mechanical layers (free items; w line width, h text height)
Top Overlay:
  drawing of 493 lines, arcs and shapes, not listed
  text "13688670331 v0.01" at 52.705,-62.738 h1.52

## Text inside footprints (layer, text, board x,y; h text height)
DB485: Top Overlay "6" at 82.909,-26.46 h1.5 r270; Top Overlay "9" at 82.909,-34.77 h1.5 r270; Top Overlay "5" at 75.946,-38.608 h1.5 r270; Top Overlay "1" at 75.946,-22.987 h1.5 r270
MK5P: Top Overlay "GND" at 5.969,-56.515 h0.4; Top Overlay "VCC" at 6.096,-53.848 h0.4; Top Overlay "D+" at 5.972,-55.141 h0.4; Top Overlay "D-" at 5.972,-54.591 h0.4
USB_H: Top Overlay "GND" at 12.129,-22.728 h1.2 r180; Top Overlay "VCC" at 11.766,-15.779 h1.2 r180; Top Overlay "D+" at 11.917,-20.1 h1.2 r180; Top Overlay "D-" at 11.796,-18.106 h1.2 r180
V-C1: Top Overlay "+" at 66.294,-9.525 h1.5 r90
V-C2: Top Overlay "+" at 37.846,-11.049 h1 r90